# Altium PCB BLE_tag_highpower.PcbDoc
Units mm, origin at the board's own origin, x right, y up, seen from the top; angles counter-clockwise.
Board outline 46 x 36.65 mm, 2 copper layers (Top Layer, Bottom Layer); 43 components, 38 nets, 163 pads, 172 vias.
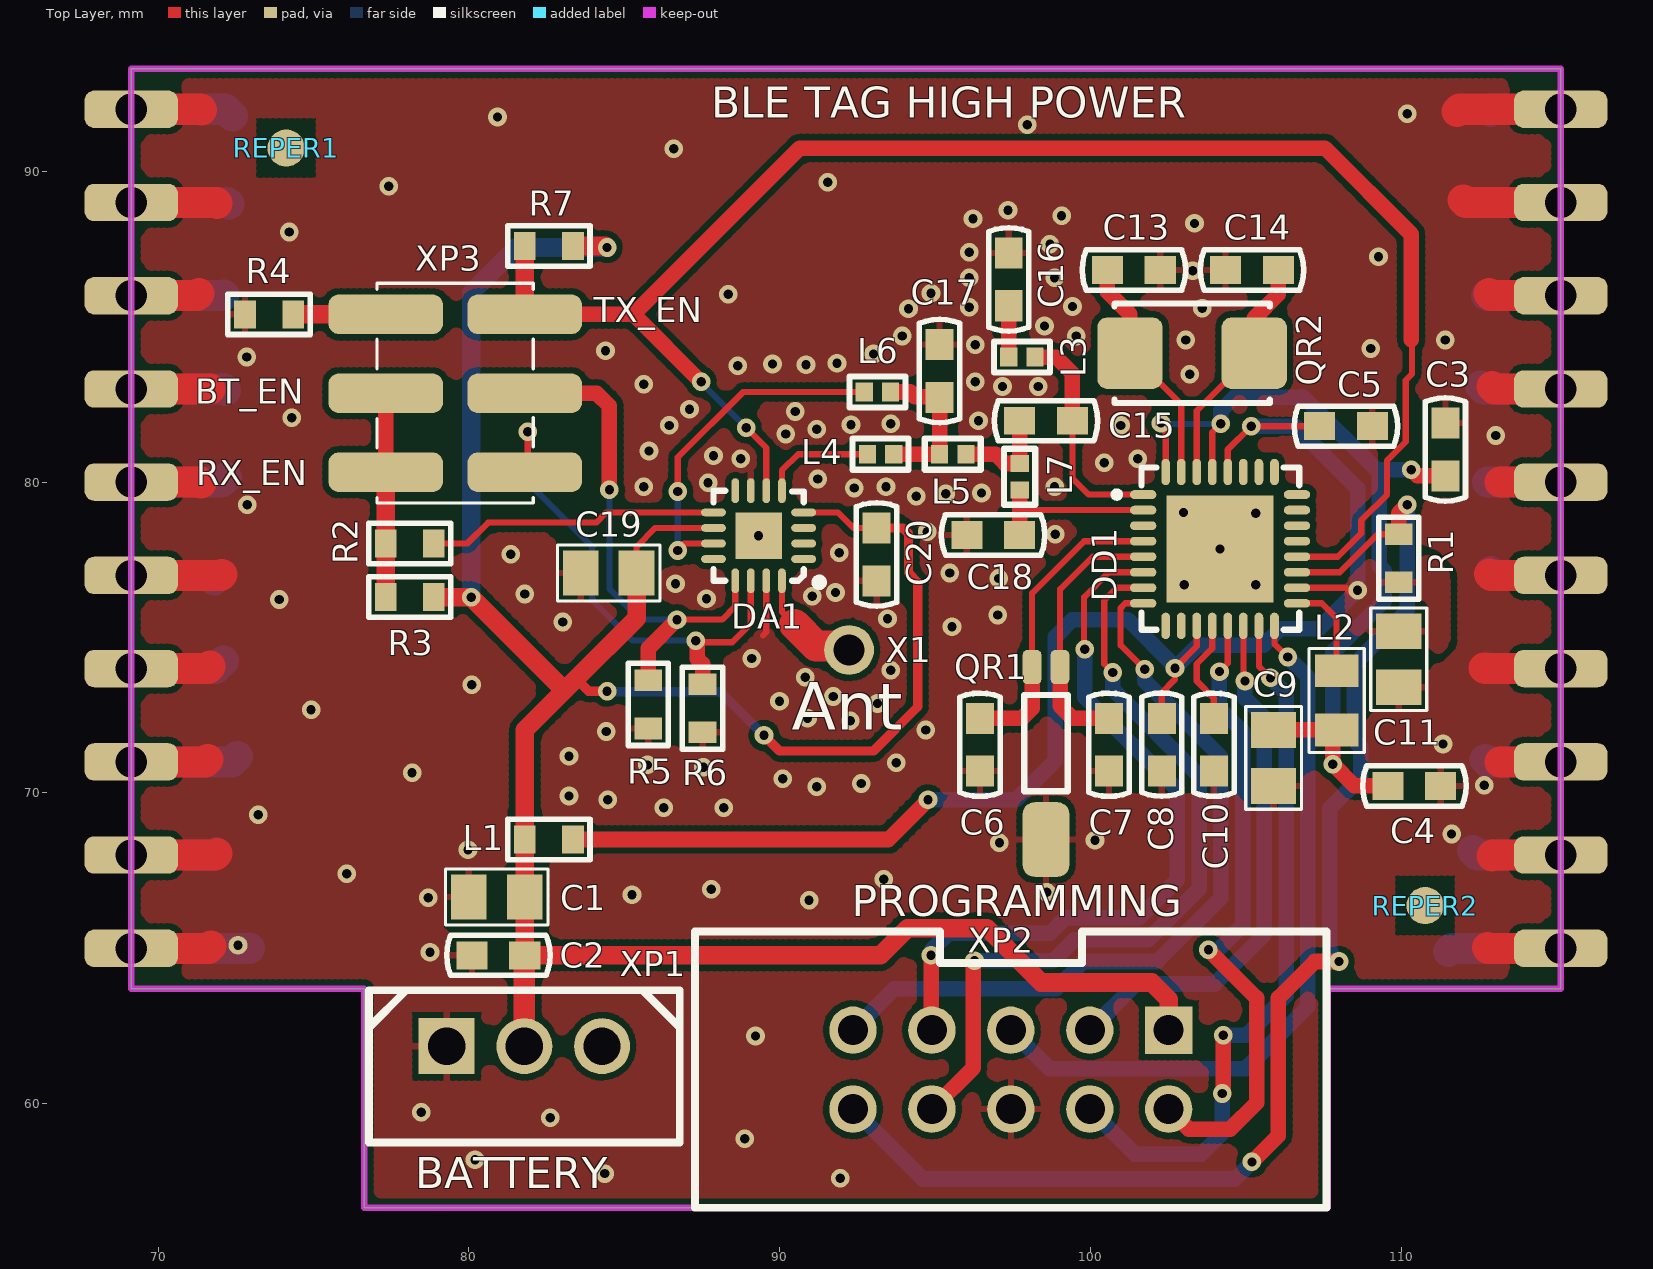
[diagram p0: Top Layer view]
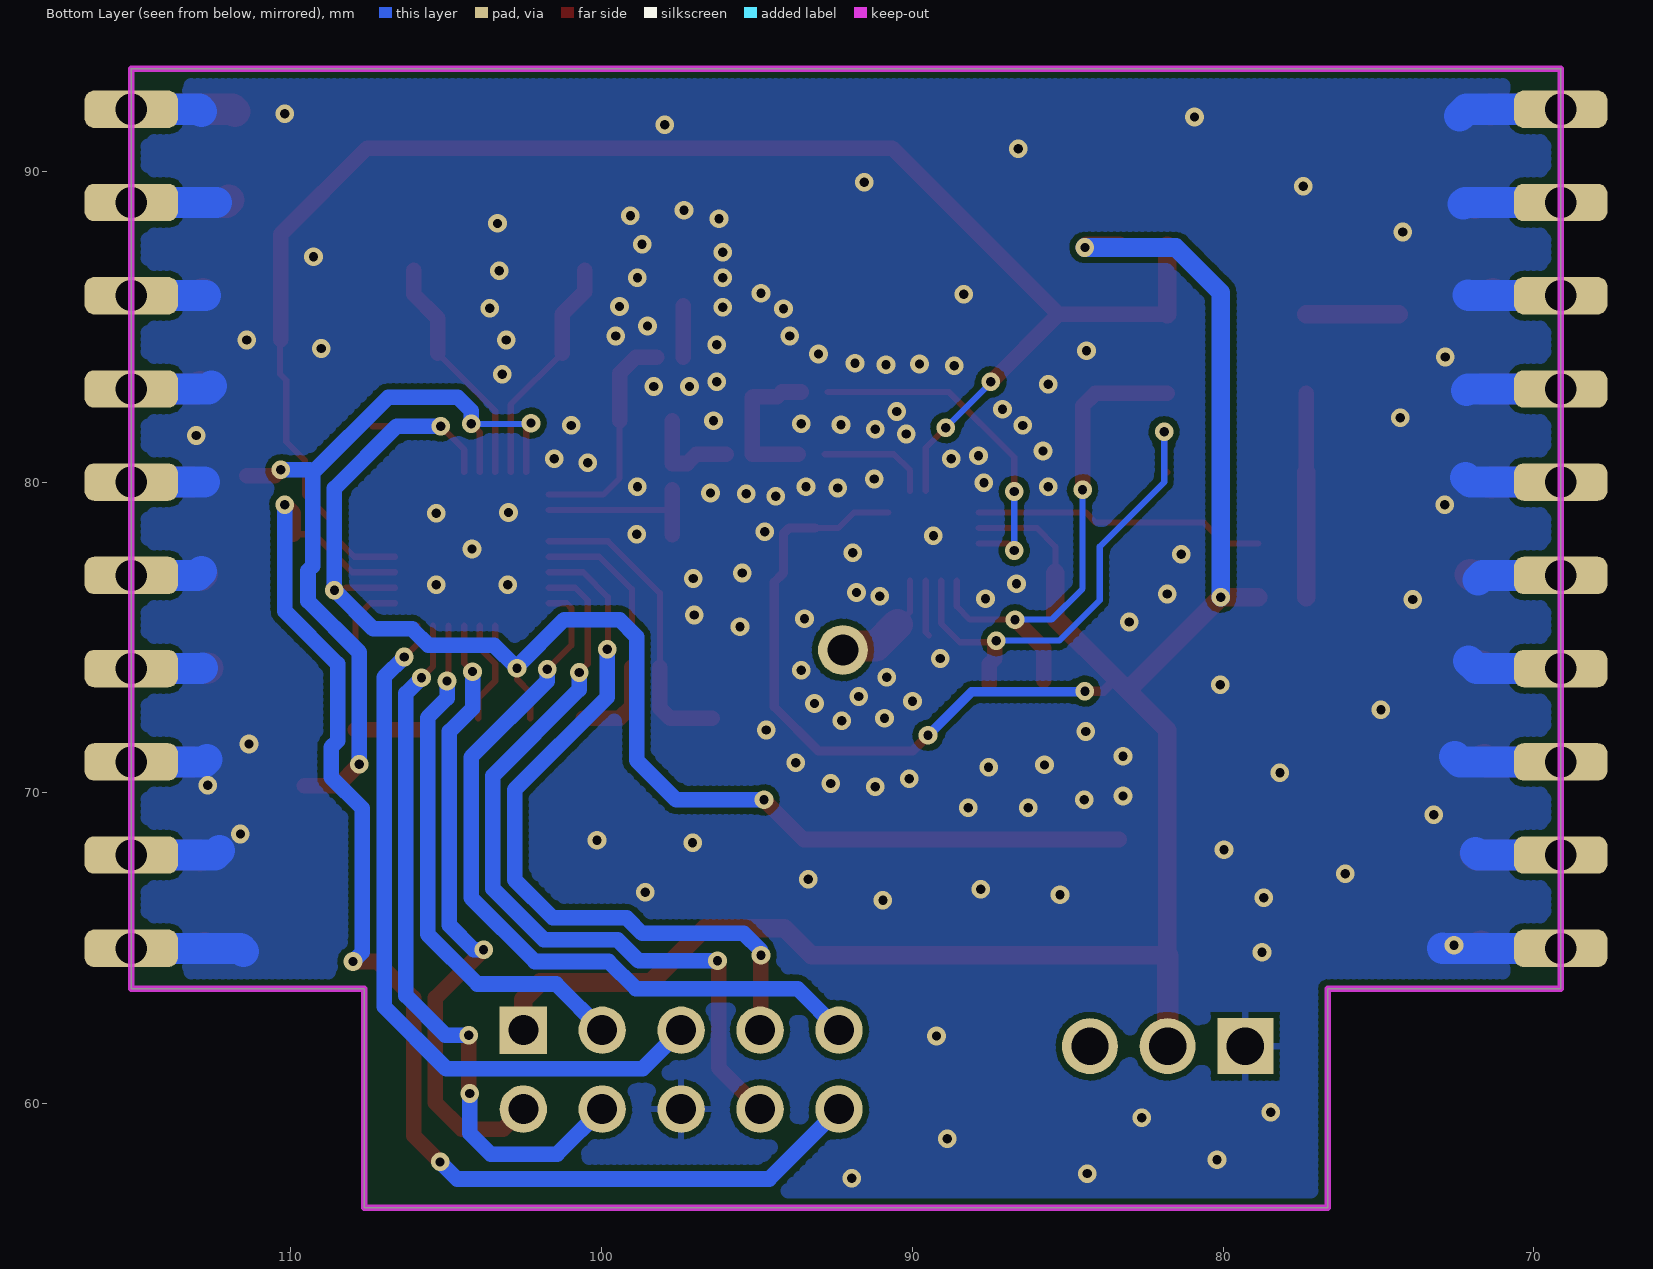
[diagram p1: Bottom Layer view, seen from below]

## Layer stack, top to bottom
Top Solder: solder mask 0.0102, Solder Resist, Dk 3.5
Top Layer: signal copper 0.0356
Dielectric 1: dielectric 0.32, FR-4, Dk 4.8
Bottom Layer: signal copper 0.0356
Bottom Solder: solder mask 0.0102, Solder Resist, Dk 3.5

## Board outline
69.138,63.699 76.638,63.699 76.638,56.649 107.638,56.649 107.638,63.699 115.138,63.699 115.138,93.299 69.138,93.299

## Design rules (kind name [scope] priority, off if disabled: settings)
Clearance [All] p1: gap=0.2 ignorepadtopadclearanceinfootprint=FALSE
PolygonConnect PolygonConnect_1 [IsVia] p1: connectstyle=Direct reliefconductorwidth=0.254 reliefentries=4 polygonreliefangle="90 Angle" airgapwidth=0.254
PolygonConnect [All] p2: connectstyle=Relief reliefconductorwidth=0.2 reliefentries=4 polygonreliefangle="90 Angle" airgapwidth=0.2
RoutingVias [All] p1: holewidth=0.4 width=0.8 viastyle="Through Hole" minholewidth=0.3 minwidth=0.6 maxholewidth=0.5 maxwidth=1
SolderMaskExpansion [All] p1: expansion=0.102
Width [All] p1: maxlimit=3 minlimit=0.2 preferedwidth=0.5
30 further rules are at their usual default settings.

## Classes and differential pairs
component class MCU: C1 C2 C3 C4 C5 C6 C7 C8 C9 C10 C11 C13 C14 DD1 L1 L2 QR1 QR2 R1 XP1 XP2
component class RF: C15 C16 C17 C18 C19 C20 DA1 L3 L4 L5 L6 L7 R2 R3 R4 R5 R6 R7 REPER1 REPER2 X1 XP3

## Components (designator, comment, footprint, x,y, rotation, side; value= is the part's Value field where it differs from the comment)
C1 "10uF" CC0805 80.9,66.65 r0 top
C2 "0.1uF" CC0603 80.95,64.775 r0 top
C3 "0.1uF" CC0603 111.425,81.05 r90 top
C4 "0.1uF" CC0603 110.425,70.225 r0 top
C5 "0.1uF" CC0603 108.225,81.8 r180 top
C6 "12pF" CC0603 96.45,71.55 r270 top
C7 "12pF" CC0603 100.6,71.55 r270 top
C8 "0.1uF" CC0603 102.3,71.55 r90 top
C9 "10uF" CC0805 105.9,71.125 r90 top
C10 "1uF" CC0603 103.975,71.55 r270 top
C11 "10uF" CC0805 109.925,74.3 r90 top
C13 "22pF" CC0603 101.4,86.825 r0 top
C14 "22pF" CC0603 105.2,86.827 r180 top
C15 "1pF" CC0603 98.575,81.975 r0 top
C16 "6.8pF" CC0603 97.375,86.525 r270 top
C17 "1pF" CC0603 95.15,83.575 r90 top
C18 "1pF" CC0603 96.875,78.3 r180 top
C19 "10uF" CC0805 84.5,77.075 r0 top
C20 "0.1uF" CC0603 93.125,77.675 r90 top
DA1 "RFX8422S" QFN-16_Skyworks 89.325,78.275 r180 top
DD1 "CC2650" QFN32_TI 101.7,79.6 r0 top
L1 "BLM18HE152SN1" L0603 81.801,68.5 r0 top
L2 "10uH" RC0805 107.925,72.975 r270 top
L3 "2.4nH" L0402 97.8,84.025 r0 top
L4 "2nH" L0402 93.25,80.9 r180 top
L5 "2nH" L0402 95.575,80.9 r180 top
L6 "n.p" L0402 93.15,82.9 r180 top
L7 "2.4nH" L0402 97.725,80.175 r90 top
QR1 "MS3V-T1R" MS3V-T1R 99.025,74.05 r270 top
QR2 "SJK-6L-24.0" AC5032_2 103.275,84.15 r0 top
R1 "100k" RC0603 109.925,77.55 r90 top
R2 "n.p" RC0603 78.1,78.025 r0 top
R3 "10k" RC0603 78.1,76.3 r0 top
R4 "10k" RC0603 73.575,85.4 r180 top
R5 "10k" RC0603 85.775,72.85 r90 top
R6 "10k" RC0603 87.525,72.725 r90 top
R7 "10k" RC0603 82.575,87.6 r180 top
REPER1 "REPER1.2" REPER1.2 74.125,90.75 r90 top
REPER2 "REPER1.2" REPER1.2 110.775,66.375 r90 top
X1 "PIN_1mm" PIN_1mm 92.238,74.599 r0 top
XP1 "MW03D" MW03D 79.288,61.849 r0 top
XP2 "BH-10" BH-10 102.523,62.364 r180 top
XP3 "PLD06_SMD" PLD06_SMD 79.575,85.4 r270 top

## Footprints (in the part's own frame and the unit in brackets; to place one, negate y for a bottom-side part, rotate by r counter-clockwise, add the part's x,y. Pads: shape width x height; smd on the part's side, far side on the other; paste and mask are expansions set on the pad)
AC5032_2 [mm]
  rrect30% 2.1x2.3 smd mask+0.05: 1(-2,0) 2(2,0)
  silkscreen extent -2.5,-1.6 2.5,1.6
BH-10 [mil]
  rect 60x60 hole 38 mask+1.97: 1(0,0)
  round 60 hole 38 mask+1.97: 2(0,100) 3(100,0) 4(100,100) 5(200,0) 6(200,100) 7(300,0) 8(300,100) 9(400,0) 10(400,100)
  silkscreen extent -200,-125 600,225
CC0603 [mm]
  rect 1x0.9 smd paste-25.4 mask+0.05: 1(-0.85,0) 2(0.85,0)
  silkscreen extent -1.66,-0.65 1.66,0.65
CC0805 [mm]
  rect 1.15x1.45 smd paste-25.4 mask+0.05: 1(-0.9,0) 2(0.9,0)
  silkscreen extent -1.65,-0.9 1.65,0.9
L0402 [mm]
  rect 0.55x0.6 smd mask+0.05: 1(-0.425,0) 2(0.425,0)
  silkscreen extent -0.9,-0.5 0.9,0.5
L0603 [mm]
  rect 0.7x0.9 smd paste-25.4 mask+0.05: 1(0,0) 2(1.549,0)
  silkscreen extent -0.55,-0.65 2.1,0.65
MS3V-T1R [mm]
  rrect50% 1.1x0.6 smd mask+0.05: 1(0,0) 2(0,-0.9)
  rrect50% 2.4x1.5 smd mask+0.05: 3(5.55,-0.45)
  silkscreen extent 0.9,-1.15 4,0.25
MW03D [mm]
  rect 1.8x1.8 hole 1.2 mask+0.05: 1(0,0)
  round 1.8 hole 1.2 mask+0.05: 2(2.5,0) 3(5,0)
  silkscreen extent -2.5,-3.1 7.5,1.8
PIN_1mm [mm]
  round 1.6 hole 1 mask+0.05: 1(0,0)
PLD06_SMD [mm]
  rrect50% 1.27x3.68 smd mask+0.05: 1(0,-2.25) 2(0,2.225) 3(2.54,-2.25) 4(2.54,2.225) 5(5.08,-2.25) 6(5.08,2.225)
  silkscreen extent -1,-2.52 6.07,2.5
QFN32_TI [mm]
  oval 0.85x0.28 smd mask+0.05: 1(0,0) 2(0,-0.5) 3(0,-1) 4(0,-1.5) 5(0,-2) 6(0,-2.5) 7(0,-3) 8(0,-3.5) 17(4.95,-3.5) 18(4.95,-3) 19(4.95,-2.5) 20(4.95,-2) 21(4.95,-1.5) 22(4.95,-1) 23(4.95,-0.5) 24(4.95,0)
  oval 0.28x0.85 smd mask+0.05: 9(0.725,-4.225) 10(1.225,-4.225) 11(1.725,-4.225) 12(2.225,-4.225) 13(2.725,-4.225) 14(3.225,-4.225) 15(3.725,-4.225) 16(4.225,-4.225) 25(4.225,0.725) 26(3.725,0.725) 27(3.225,0.725) 28(2.725,0.725) 29(2.225,0.725) 30(1.725,0.725) 31(1.225,0.725) 32(0.725,0.725)
  rect 3.45x3.45 smd mask+0.05: 33(2.475,-1.75)
  silkscreen extent -0.95,-4.35 5.02,0.87
QFN-16_Skyworks [mm]
  oval 0.8x0.25 smd mask+0.05: 1(-1.45,0.75) 2(-1.45,0.25) 3(-1.45,-0.25) 4(-1.45,-0.75) 9(1.45,-0.75) 10(1.45,-0.25) 11(1.45,0.25) 12(1.45,0.75)
  oval 0.25x0.8 smd mask+0.05: 5(-0.75,-1.45) 6(-0.25,-1.45) 7(0.25,-1.45) 8(0.75,-1.45) 13(0.75,1.45) 14(0.25,1.45) 15(-0.25,1.45) 16(-0.75,1.45)
  rect 1.5x1.5 smd mask+0.05: 17(0,0)
  silkscreen extent -2.08,-1.45 1.45,1.62
RC0603 [mm]
  rect 0.7x0.9 smd paste-25.4 mask+0.05: 1(-0.775,0) 2(0.774,0)
  silkscreen extent -1.32,-0.65 1.33,0.65
RC0805 [mm]
  rect 1.05x1.4 smd paste-25.4 mask+0.05: 1(-0.95,0) 2(0.95,0)
  silkscreen extent -1.67,-0.89 1.67,0.89
REPER1.2 [mm]
  round 1.2 smd paste-25.4 mask+0.05: 1(0,0)
  Top Layer pour cut-out: -1.2,-1.2 1.2,-1.2 1.2,1.2 -1.2,1.2

## Part data
C1 C9 C11 C19: library part CC0805, "CC0805"
C2 C3 C4 C5 C6 C7 C8 C10 C13 C14 C15 C16 C17 C18 C20: library part CC0603, "CC0603"
DD1: library part CC2650RHB, "CC2650RHBT"
L1: library part L0603, "L0603"
L2: library part L0805, "L0805"
L3 L4 L5 L6 L7: library part L0402, "L0402"
QR1: "CRYSTAL_32768 Hz"
QR2: library part AC5032_2, "AC5032/2"
R1 R2 R3 R4 R5 R6 R7: library part RC0603, "RC0603"

## Free pads (board coordinates)
  rrect50% 3x1.2 hole 1 mask+0.05: 0(69.138,64.999) 0(69.138,67.999) 0(69.138,70.999) 0(69.138,73.999) 0(69.138,76.999) 0(69.138,79.999) 0(69.138,82.999) 0(69.138,85.999) 0(69.138,88.999) 0(69.138,91.999) 0(115.138,64.999) 0(115.138,67.999) 0(115.138,70.999) 0(115.138,73.999) 0(115.138,76.999) 0(115.138,79.999) 0(115.138,82.999) 0(115.138,85.999) 0(115.138,88.999) 0(115.138,91.999)

## Via types
v1: diameter 0.6, hole 0.3, Top Layer to Bottom Layer, 172 vias

## Nets (pads, with @x,y where several pads share a name; then routed paths per layer and width w, separated by ;. In a path a pad name is that pad's centre, name@x,y a point inside that pad or via, vN(x,y) a via of type N, cw(c..) or ccw(c..) an arc to the next point about the centre after c; other vN are vias at no path point)
GND: C1.1 C2.1 C3.2 C4.2 C5.1 C6.2 C7.2 C8.1 C9.1 C10.2 C11.1 C13.2 C14.2 C16.1 C17.2 C18.2 C19.1 C20.1 DA1.1 DA1.7 DA1.15 DA1.17 DD1.33 pad.0 QR1.3 R4.2 R5.1 R6.1 XP1.1 XP2.6 | length 109.2
  Top Layer w0.2: 89.463,75.06 89.575,75.172 DA1.15
  Top Layer w1: pad.0@69.138,64.999 71.624,64.999 71.7,65.075 ; pad.0@69.138,67.999 71.849,67.999 71.9,68.05 ; pad.0@69.138,70.999 71.524,70.999 71.6,71.075 ; pad.0@69.138,73.999 71.599,73.999 71.675,74.075 ; pad.0@69.138,76.999 72.024,76.999 72.05,77.025 ; pad.0@69.138,79.999 71.351,79.999 71.375,79.975 ; pad.0@69.138,82.999 71.674,82.999 71.675,83 ; pad.0@69.138,85.999 71.249,85.999 71.325,86.075 ; pad.0@69.138,88.999 71.876,88.999 71.9,88.975 ; pad.0@69.138,91.999 71.376,91.999 71.4,91.975 ; 111.8,91.925 111.874,91.999 pad.0@115.138,91.999 ; 112,89.075 112.076,88.999 pad.0@115.138,88.999 ; 112.675,74.025 112.701,73.999 pad.0@115.138,73.999 ; 112.775,65.025 112.801,64.999 pad.0@115.138,64.999 ; 112.825,86.075 112.901,85.999 pad.0@115.138,85.999 ; 112.85,77.05 112.901,76.999 pad.0@115.138,76.999 ; 112.925,67.975 112.949,67.999 pad.0@115.138,67.999 ; 112.925,83.075 113.001,82.999 pad.0@115.138,82.999 ; 113.189,70.999 pad.0@115.138,70.999 ; 113.189,79.999 pad.0@115.138,79.999
  Bottom Layer w1: pad.0@69.138,64.999 72.949,64.999 72.95,65 ; pad.0@69.138,67.999 71.799,67.999 71.875,68.075 ; pad.0@69.138,70.999 72.374,70.999 72.55,71.175 ; pad.0@69.138,73.999 71.849,73.999 72.1,74.25 ; pad.0@69.138,76.999 71.651,76.999 71.8,76.85 ; pad.0@69.138,79.999 72.049,79.999 72.2,80.15 ; pad.0@69.138,82.999 72.126,82.999 72.175,82.95 ; pad.0@69.138,85.999 72.099,85.999 72.125,86.025 ; pad.0@69.138,88.999 72.226,88.999 72.275,88.95 ; pad.0@69.138,91.999 72.176,91.999 72.4,91.775 ; 111.525,64.9 111.624,64.999 pad.0@115.138,64.999 ; 112.3,68.15 112.451,67.999 pad.0@115.138,67.999 ; 112.4,89 112.401,88.999 pad.0@115.138,88.999 ; 112.55,83.1 112.651,82.999 pad.0@115.138,82.999 ; 112.7,71.075 112.776,70.999 pad.0@115.138,70.999 ; 112.75,86 112.751,85.999 pad.0@115.138,85.999 ; 112.775,80 112.776,79.999 pad.0@115.138,79.999 ; 112.85,74.025 112.876,73.999 pad.0@115.138,73.999 ; 112.875,77.125 113.001,76.999 pad.0@115.138,76.999 ; 112.875,91.925 112.949,91.999 pad.0@115.138,91.999
  other v1: 91.95,57.6 84.375,57.75 80.2,58.2 88.875,58.875 82.625,59.55 78.475,59.725 89.225,62.175 78.75,64.875 72.575,65.1 90.95,66.55 78.7,66.625 85.25,66.725 98.6,66.8 87.8,66.9 93.35,67.225 76.075,67.4 79.975,68.175 97.075,68.4 100.15,68.475 111.625,68.675 73.225,69.3 86.275,69.525 88.2,69.525 84.475,69.775 83.225,69.9 91.2,70.2 112.675,70.25 92.625,70.3 90.1,70.45 78.175,70.65 87.55,70.825 85.75,70.9 93.75,70.975 83.225,71.175 111.35,71.575 84.425,71.975 94.7,72.025 92.275,72.325 90.9,72.4 74.925,72.675 93.15,72.875 90,72.95 91.725,73.1 80.1,73.475 90.825,73.725 93.575,73.95 89.1,74.325 95.55,75.35 83.025,75.5 93.475,75.6 97.025,75.725 73.9,76.225 87.65,76.25 91.05,76.325 81.805,76.4 91.8,76.45 103.025,76.7 105.325,76.7 86.65,76.725 97.05,76.9 95.475,77.075 81.35,77.675 91.925,77.725 104.175,77.85 89.325,78.275 98.875,78.325 94.748,78.4 105.325,79 103,79.025 72.875,79.275 94.4,79.549 95.35,79.625 96.5,79.65 92.4,79.813 85.626,79.85 93.425,79.85 98.85,79.85 87.7,79.975 91.225,80.1 100.45,80.625 88.75,80.75 101.525,80.75 87.875,80.85 85.8,81 113.05,81.5 90.2,81.55 91.2,81.7 86.45,81.825 100.975,81.825 92.3,81.85 93.575,81.875 96.4,81.975 74.3,82.075 90.5,82.275 87.1,82.35 97.175,83.075 98.325,83.075 85.625,83.15 96.3,83.225 103.2,83.475 88.65,83.75 90.85,83.775 89.775,83.8 91.85,83.825 72.85,84.025 93.025,84.125 84.4,84.225 109.025,84.3 96.3,84.425 103.075,84.575 111.425,84.575 93.95,84.7 99.55,84.7 98.525,85.025 94.15,85.575 103.6,85.6 96.1,85.625 99.425,85.65 88.35,86.05 94.875,86.075 96.1,86.575 98.85,86.575 103.3,86.8 109.275,87.25 96.1,87.4 98.7,87.65 74.225,88.05 103.35,88.325 96.225,88.475 99.075,88.575 97.35,88.75 77.425,89.525 91.55,89.65 86.6,90.725 97.975,91.5 80.925,91.75 110.2,91.85
JTAG_TCK: DD1.14 XP2.3 | length 17.1
  Top Layer w0.2: DD1.14 104.925,73.65 v1(104.975,73.6)
  Bottom Layer w0.5: XP2.3 101.469,63.85 104,63.85 105.6,65.45 105.6,72.425 104.975,73.05 v1(104.975,73.6)
JTAG_TDI: DD1.16 XP2.5 | length 23.6
  Top Layer w0.2: DD1.16 105.925,74.8 v1(106.35,74.375)
  Bottom Layer w0.5: XP2.5 98.682,61.125 105,61.125 107,63.125 107,73.725 v1(106.35,74.375)
JTAG_TDO: DD1.15 XP2.4 | length 23.1
  Top Layer w0.2: DD1.15 105.425,74.075 v1(105.8,73.7)
  Top Layer w0.5: v1(104.25,60.325) 104.275,60.35 v1(104.275,62.2)
  Bottom Layer w0.5: XP2.4 101.432,58.375 103.575,58.375 104.25,59.05 v1(104.25,60.325) ; v1(104.275,62.2) 105.025,62.2 106.3,63.475 106.3,73.2 v1(105.8,73.7)
JTAG_TMS: DD1.13 XP2.2 | length 20.5
  Top Layer w0.2: v1(104.155,73.904) 104.425,74.174 DD1.13
  Top Layer w0.5: XP2.2 103.172,59.175 104.5,59.175 105.35,60.025 105.35,63.4 v1(103.8,64.95)
  Bottom Layer w0.5: v1(103.8,64.95) 104.11,64.95 104.9,65.74 104.9,71.975 104.155,72.72 v1(104.155,73.904)
MISO: DD1.25
MOSI: DD1.24
MRDO: DD1.8 XP2.9 | length 25
  Top Layer w0.2: DD1.8 101.125,76.1 100.975,75.95 100.975,74.75 v1(101.75,73.975)
  Bottom Layer w0.5: XP2.9 93.699,63.7 98.9,63.7 99.775,64.575 102.15,64.575 104.2,66.625 104.2,71.15 101.75,73.6 v1(101.75,73.975)
NetC3_1: C3.1 C4.1 C9.2 DD1.29 DD1.32 L2.2 | length 29.6
  Top Layer w0.2: v1(102.275,81.9) 102.425,81.75 DD1.32 ; DD1.29 103.925,81.6 v1(104.2,81.875)
  Top Layer w0.5: C9.2 L2.2 107.8,71.9 v1(107.8,70.925) 108.5,70.225 C4.1 ; v1(110.325,80.4) 110.525,80.2 C3.1
  Bottom Layer w0.2: v1(102.275,81.9) 102.3,81.875 v1(104.2,81.875)
  Bottom Layer w0.5: v1(104.2,81.875) 104.2,82.3 104.625,82.725 106.875,82.725 109.3,80.3 ; v1(107.8,70.925) 107.8,74.525 109.45,76.175 109.45,77.15 109.3,77.3 109.3,80.3 ; v1(110.325,80.4) 109.4,80.4 109.3,80.3
NetC6_1: C6.1 DD1.4 QR1.2 | length 9.8
  Top Layer w0.2: QR1.2 98.125,76.425 99.8,78.1 DD1.4
  Top Layer w0.5: C6.1 97.8,72.4 98.125,72.725 QR1.2
NetC7_1: C7.1 DD1.5 QR1.1 | length 8.6
  Top Layer w0.2: QR1.1 99.025,76.55 100.075,77.6 DD1.5
  Top Layer w0.5: QR1.1 99.025,72.8 99.425,72.4 C7.1
NetC10_1: C10.1 DD1.12 | length 3.4
  Top Layer w0.2: DD1.12 103.925,74.65 103.425,74.15 103.425,73.6 103.975,73.05 C10.1
NetC13_1: C13.1 DD1.31 QR2.1 | length 7.5
  Top Layer w0.2: QR2.1 102.925,82.5 DD1.31
  Top Layer w0.5: C13.1 100.55,86.125 101.275,85.4 QR2.1
NetC14_1: C14.1 DD1.30 QR2.2 | length 7.6
  Top Layer w0.2: DD1.30 103.425,82.3 QR2.2
  Top Layer w0.5: QR2.2 105.275,85.275 106.05,86.05 C14.1@106.05,86.825
NetC15_1: C15.1 L5.1 L7.2 | length 3.2
  Top Layer w0.5: L5.1 96.95,80.9 97.25,80.6 L7.2 C15.1
NetC16_2: C16.2 L3.1 | length 1.7
  Top Layer w0.5: L3.1 C16.2
NetC17_1: C17.1 L4.1 L5.2 L6.1 | length 4.9
  Top Layer w0.5: L6.1 94.2,82.9 94.35,82.75 95.125,82.75 C17.1 L5.2 L4.1
NetDA1_5: DA1.5 L4.2 | length 3.6
  Top Layer w0.2: DA1.5 90.075,80.375 90.6,80.9 L4.2
NetDA1_9: DA1.9 R2.2 | length 9.4
  Top Layer w0.2: R2.2 79.95,78.025 80.625,78.7 84.1,78.7 84.425,79.025 DA1.9
NetDA1_11: DA1.11 L6.2 | length 11.1
  Top Layer w0.2: v1(86.725,77.8) 86.725,77.825 86.925,78.025 DA1.11 ; v1(86.725,79.7) 86.725,80.8 88.825,82.9 L6.2
  Bottom Layer w0.2: v1(86.725,77.8) v1(86.725,79.7)
NetDA1_13: DA1.13 R5.2 XP3.4 | length 16.6
  Top Layer w0.2: v1(86.7,75.575) 88.15,75.575 88.575,76 DA1.13
  Top Layer w0.5: XP3.4 84.115,82.86 84.525,82.45 v1(84.525,79.75) ; R5.2 85.775,74.65 v1(86.7,75.575)
  Bottom Layer w0.2: v1(84.525,79.75) 84.525,76.575 85.525,75.575 v1(86.7,75.575)
NetDA1_14: DA1.14 R6.2 XP3.6 | length 16.3
  Top Layer w0.2: XP3.6 81.9,80.42 v1(81.9,81.625) ; v1@87.35,74.85 88.475,74.85 89.075,75.45 DA1.14
  Top Layer w0.5: v1@87.35,74.85 87.35,74.325 87.525,74.15 R6.2
  Bottom Layer w0.2: v1(81.9,81.625) 81.9,80 83.975,77.925 83.975,76.2 85.275,74.9 v1(87.3,74.9)
NetDA1_16: DA1.16 X1.1 | length 3.7
  Top Layer w0.2: DA1.16 90.075,75.825 90.475,75.425
  Top Layer w1: 90.475,75.425 91.175,74.725 92.112,74.725 X1.1
NetDD1_17: DD1.17 L2.1 | length 3.2
  Top Layer w0.2: DD1.17 107.45,76.1 107.925,75.625 L2.1
NetDD1_19: DD1.19 R1.2 XP2.10 | length 42.9
  Top Layer w0.2: DD1.19 108.025,77.1 109.249,78.324 R1.2
  Top Layer w0.5: v1(105.2,58.125) 106.05,58.975 106.05,63.4 107.225,64.575 v1(108,64.575) ; R1.2 109.925,79 v1(110.2,79.275)
  Bottom Layer w0.5: XP2.10 94.612,57.575 104.65,57.575 v1(105.2,58.125) ; v1(108,64.575) 107.7,64.875 107.7,69.5 108.7,70.5 108.7,71.475 108.5,71.675 108.5,74.15 110.2,75.85 v1(110.2,79.275)
NetR2_1: R2.1 R3.1 XP3.3 XP3.5 | length 6.6
  Top Layer w0.5: XP3.5 XP3.3
  Top Layer w0.6: R3.1 R2.1 XP3.5
NetR4_1: R4.1 XP3.1 | length 3
  Top Layer w0.6: R4.1 XP3.1
RF_N: C18.1 DD1.2 L7.1 | length 5.5
  Top Layer w0.2: 97.725,79.025 97.8,79.1 DD1.2
  Top Layer w0.5: C18.1 97.725,79.025 L7.1
RF_P: C15.2 DD1.1 L3.2 | length 7.3
  Top Layer w0.2: C15.2 99.425,80.125 99.95,79.6 DD1.1
  Top Layer w0.5: L3.2 98.9,84.025 99.425,83.5 C15.2
RXD: DD1.7 XP2.8 | length 25.5
  Top Layer w0.2: v1(100.725,73.875) 100.45,74.15 100.45,76.2 100.85,76.6 DD1.7
  Top Layer w0.5: XP2.8 96.231,61.152 96.231,64.556 v1(96.275,64.6)
  Bottom Layer w0.5: v1(96.275,64.6) 98.81,64.6 99.485,65.275 101.86,65.275 103.5,66.915 103.5,70.55 100.725,73.325 v1(100.725,73.875)
SCK: DD1.23
SRDI: DD1.9
SS0: DD1.22
SS1: DD1.21
TXD: DD1.6 XP2.7 | length 24
  Top Layer w0.2: v1(99.825,74.625) 99.8,74.65 99.8,76.3 100.6,77.1 DD1.6
  Top Layer w0.5: v1(94.875,64.775) 94.875,62.392 XP2.7
  Bottom Layer w0.5: v1(94.875,64.775) 94.875,64.925 95.43,65.48 98.7,65.48 99.195,65.975 101.57,65.975 102.8,67.205 102.8,70.1 99.825,73.075 v1(99.825,74.625)
TXEN: DA1.6 DD1.20 R7.2 XP3.2 | length 54.2
  Top Layer w0.2: v1(88.925,81.75) 89.575,81.1 DA1.6 ; DD1.20 107.959,77.6 108.717,78.358 108.717,78.767 109.55,79.6 109.55,80.7 110.15,81.3 110.15,83.275 110.35,83.475 110.35,84.55 110.325,84.575
  Top Layer w0.5: XP3.2 85.3,85.4 ; v1(87.475,83.225) 85.3,85.4 ; 110.325,84.575 110.325,87.975 107.55,90.75 90.65,90.75 85.3,85.4
  Top Layer w0.6: XP3.2 R7.2
  Bottom Layer w0.2: v1(87.475,83.225) 87.475,83.2 v1(88.925,81.75)
VBAT: C1.2 C2.2 C19.2 C20.2 DA1.4 DA1.10 L1.1 R3.2 R7.1 XP1.2 XP2.1 | length 86.6
  Top Layer w0.2: C19.2 85.4,77.925 86,78.525 DA1.10 ; DA1.4 91.875,79.025 92.375,78.525 C20.2
  Top Layer w0.3: 83.45,73.675 83.85,73.275 v1(84.45,73.275) ; v1(89.5,71.85) 90,71.35 93.025,71.35 94.45,72.775 94.45,76.775 94.15,77.075 94.15,78.35 93.975,78.525 C20.2
  Top Layer w0.6: R3.2 v1(80.075,76.3) 83.037,73.338 83.113,73.338 ; L1.1@81.8,68.499 C1.2 C2.2 93.25,64.775 94.125,65.65 96.675,65.65 98.425,63.9 101.975,63.9 102.523,63.352 XP2.1 ; L1.1 81.801,72.026 83.113,73.338 ; R7.1 84.4,87.6 v1(84.45,87.55) ; C19.2 85.4,75.625 83.45,73.675 83.113,73.338
  Top Layer w0.7: XP1.2 81.788,64.763 C2.2
  Bottom Layer w0.3: v1(84.45,73.275) 84.475,73.25 88.1,73.25 v1(89.5,71.85)
  Bottom Layer w0.6: v1(80.075,76.3) 80.075,86.1 81.525,87.55 v1(84.45,87.55)
VBAT_F: C5.2 C8.2 C11.2 DD1.11 DD1.18 DD1.28 L1.2 R1.1 | length 49
  Top Layer w0.2: C8.2 102.3,73.225 102.725,73.65 v1(102.725,74.016) 103.425,74.716 DD1.11 ; DD1.28 104.425,81.05 v1(105.175,81.8) C5.2 ; DD1.18 108.225,76.6 v1@108.425,76.4
  Top Layer w0.5: L1.2 93.5,68.5 v1(94.775,69.775)
  Bottom Layer w0.5: v1(94.775,69.775) 97.6,69.775 98.875,71.05 98.875,75.025 99.425,75.575 101.211,75.575 102.725,74.061 v1(102.725,74.016) 103.459,74.75 105.575,74.75 106.1,75.275 107.35,75.275 v1(108.6,76.525) 108.6,79.8 106.6,81.8 v1(105.175,81.8)
pads on no net: DA1.2 DA1.3 DA1.8 DA1.12 DD1.3 DD1.10 DD1.26 DD1.27 REPER1.1 REPER2.1 XP1.3

## Polygon pours and split planes (outlines as drawn)
GND on Top Layer "GND_L01_P002" (hatched 90Degree grid 0.2 track 0.5, remove dead copper, pour order 2): 69.138,93.299 115.138,93.299 115.138,63.699 107.638,63.699 107.638,56.649 76.638,56.649 76.638,63.699 69.138,63.699
VBAT_F on Top Layer "VBAT_F_L01_P000" (hatched 90Degree grid 0.2 track 0.5, remove dead copper, pour order 0): 109.125,77.4 108.425,76.7 108.425,75.475 109.325,74.575 111.05,74.575 111.35,74.875 111.35,76.975 110.925,77.4
GND on Bottom Layer "GND_L02_P004" (hatched 90Degree grid 0.2 track 0.5, remove dead copper, pour order 4): 69.138,93.299 115.138,93.299 115.138,63.699 107.638,63.699 107.638,56.649 76.638,56.649 76.638,63.699 69.138,63.699

## Keep-outs
Keep-Out Layer:
  the board outline again, w0.2

## Silkscreen, mask and mechanical layers (free items; w line width, h text height)
Top Overlay:
  text "BLE TAG HIGH POWER" at 87.8,91.725 h1
  text "TX_EN" at 84.025,85.15 h0.8
  text "BT_EN" at 71.2,82.525 h0.8
  text "RX_EN" at 71.225,79.9 h0.8
  text "Ant" at 90.4,72.025 h1.52
  text "PROGRAMMING" at 92.325,66.025 h1
  text "BATTERY" at 78.275,57.275 h1